# EAGLE board working (EAGLE 9.5.2)
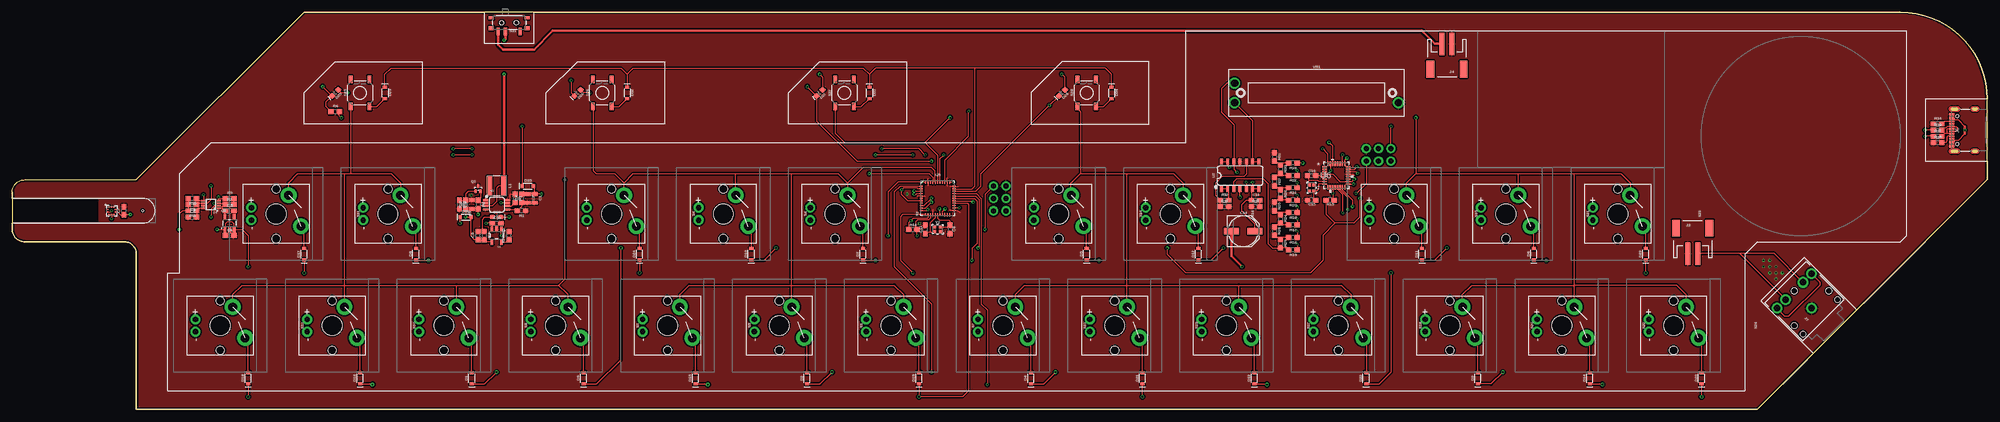
[diagram p0: board, top side]
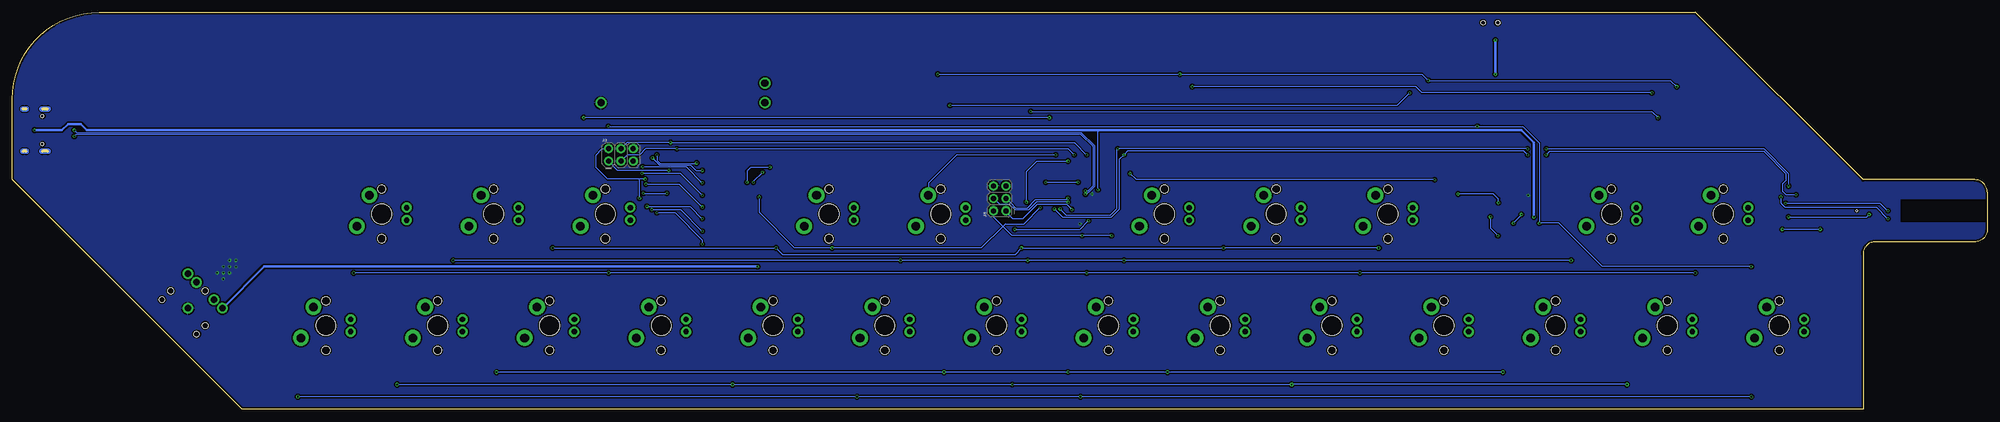
[diagram p1: board, bottom side, seen from below]

Size 403.86 x 81.28 mm. Coordinates in mm from the lower left corner, seen from the top.
Outline: 25.4,0 356.87,0 403.86,46.99 403.86,63.5 arc90 386.08,81.28 59.69,81.28 25.4,46.99 2.54,46.99 arc90 0,44.45 0,36.83 arc90 2.54,34.29 22.86,34.29 arc-90 25.4,31.75 25.4,0
Copper layers (1*16): Top 0.035mm / dielectric 1.5mm / Bottom 0.035mm
Design rules "SparkFun-2-Layer-Minimum-JLCPCB": minimum track width 5mil, minimum drill 0.3mm, track to track 5mil, track to pad 5mil, pad to pad 5mil, via to via 5mil, smd to smd 5mil, copper to edge 7mil, drill to drill 7mil, minimum pad ring 5mil, minimum via ring 5mil, stop-mask expansion 4mil, vias tented up to drill 25mil, thermal gap 10mil
Holes 0.38 mm at 26.67,40.64

## Footprints (pad centres in the part's own frame; a part is rotated, then mirrored left to right if it is on the bottom)
0805 = smd 0.8 x 1.2: 1 -0.9,0; 2 0.9,0
0603 = smd 1.1 x 1: 1 -0.85,0; 2 0.85,0
PANASONIC_D = smd 3 x 1.4: + 2.4,0; - -2.4,0
SOD-323@1 = smd 0.63 x 0.83: A 1.15,0; C -1.15,0
LED-0603@1 = smd 1 x 1: A -0.877,0; C 0.877,0
SOD-323 = smd 0.63 x 0.83: A 1.15,0; C -1.15,0
JST-2-SMD = smd 1 x 4.6: 1 -1,-3.7; 2 1,-3.7 | smd 1.6 x 3.4: NC1 -3.4,1.5; NC2 3.4,1.5
2X3-NS = drill 1.016 pad 1.88: 1 -2.54,-1.27; 2 -2.54,1.27; 3 0,-1.27; 4 0,1.27; 5 2.54,-1.27; 6 2.54,1.27
USB-C-16P-2LAYER-PADS = smd 0.3 x 1: A5 -1.25,-0.34; A6 -0.25,-0.34; A7 0.25,-0.34; A8 1.25,-0.34; B5 1.75,-0.34; B6 0.75,-0.34; B7 -0.75,-0.34; B8 -1.75,-0.34 | smd 0.6 x 1: GND -3.225,-0.34; GND2 3.225,-0.34; VBUS1 -2.45,-0.34; VBUS2 2.45,-0.34 | drill 0.4 pad 0.6 long: SHLD1 -4.318,-0.915; SHLD2 4.318,-0.915; SHLD3 -4.318,-5.095; SHLD4 4.318,-5.095 | hole 0.65: -2.89,-1.445; 2.89,-1.445
AUDIO-JACK = drill 1.3 pad 2.184: RING 5,5; RSH 5,2.5; SLEEVE 0,0; TIP 5,-5; TSH 5,-2.5 | hole 1.2: 0,5; -2.5,5; -2.5,-5; 0,-5; 5,0
INDUCTOR_4X4MM = smd 4.089 x 1.143: P$1 0,1.473; P$2 0,-1.473
SOT-416FL = smd 0.46 x 0.65: 1 -0.5,-1.1; 2 0.5,-1.1; 3 0,0.05
CHERRY-MX-LED-1U = drill 1.092 pad 2.032: A 8.255,4.445; K 10.795,4.445 | drill 1.753 pad 3.226: S1 5.715,12.065; S2 12.065,14.605 | hole 4.089: 9.525,9.525 | hole 1.707: 4.445,9.525; 14.605,9.525
TACTILE_SWITCH_SMD_5.2MM = smd 1.524 x 0.762: 1 -2.794,1.905; 2 2.794,1.905; 3 -2.794,-1.905; 4 2.794,-1.905
SWITCH_SPST_SMD_A = smd 0.7 x 1.5: 1 -2.25,-1.75; 2 -0.75,-1.75; 3 2.25,-1.75 | smd 1 x 0.6: GND1 -3.65,1; GND3 3.65,1 | smd 1 x 0.8: GND2 -3.65,-1.1; GND4 3.65,-1.1 | hole 0.9: -1.5,0; 1.5,0
SOT23-5 = smd 0.55 x 1.2: 1 -0.95,-1.3; 2 0,-1.3; 3 0.95,-1.3; 4 0.95,1.3; 5 -0.95,1.3
MSOP8 = smd 0.4 x 1.1: 1 -0.975,-2.25; 2 -0.325,-2.25; 3 0.325,-2.25; 4 0.975,-2.25; 5 0.975,2.25; 6 0.325,2.25; 7 -0.325,2.25; 8 -0.975,2.25
VSSOP_8PIN = smd 0.8 x 0.3: P1 -1.55,0.75; P2 -1.55,0.25; P3 -1.55,-0.25; P4 -1.55,-0.75; P5 1.55,-0.75; P6 1.55,-0.25; P7 1.55,0.25; P8 1.55,0.75
QFN-44-NOPAD_1:1-LESS_PASTE = smd 0.8 x 0.3: 1 -3.337,2.458; 2 -3.337,1.958; 3 -3.337,1.479; 4 -3.337,0.979; 5 -3.337,0.5; 6 -3.337,0; 7 -3.337,-0.5; 8 -3.337,-0.979; 9 -3.337,-1.479; 10 -3.337,-1.958; 11 -3.337,-2.458; 23 3.337,-2.458; 24 3.337,-1.958; 25 3.337,-1.479; 26 3.337,-0.979; 27 3.337,-0.5; 28 3.337,0; 29 3.337,0.5; 30 3.337,0.979; 31 3.337,1.479; 32 3.337,1.958; 33 3.337,2.458 | smd 0.3 x 0.8: 12 -2.458,-3.337; 13 -1.958,-3.337; 14 -1.479,-3.337; 15 -0.979,-3.337; 16 -0.5,-3.337; 17 0,-3.337; 18 0.5,-3.337; 19 0.979,-3.337; 20 1.479,-3.337; 21 1.958,-3.337; 22 2.458,-3.337; 34 2.458,3.337; 35 1.958,3.337; 36 1.479,3.337; 37 0.979,3.337; 38 0.5,3.337; 39 0,3.337; 40 -0.5,3.337; 41 -0.979,3.337; 42 -1.479,3.337; 43 -1.958,3.337; 44 -2.458,3.337
32M1-A_ATM = smd 0.914 x 0.254: 1 -2.4,1.75; 2 -2.4,1.25; 3 -2.4,0.75; 4 -2.4,0.25; 5 -2.4,-0.25; 6 -2.4,-0.75; 7 -2.4,-1.25; 8 -2.4,-1.75; 17 2.4,-1.75; 18 2.4,-1.25; 19 2.4,-0.75; 20 2.4,-0.25; 21 2.4,0.25; 22 2.4,0.75; 23 2.4,1.25; 24 2.4,1.75 | smd 0.254 x 0.914: 9 -1.75,-2.4; 10 -1.25,-2.4; 11 -0.75,-2.4; 12 -0.25,-2.4; 13 0.25,-2.4; 14 0.75,-2.4; 15 1.25,-2.4; 16 1.75,-2.4; 25 1.75,2.4; 26 1.25,2.4; 27 0.75,2.4; 28 0.25,2.4; 29 -0.25,2.4; 30 -0.75,2.4; 31 -1.25,2.4; 32 -1.75,2.4
SO14 = smd 0.6 x 1.2: 1 -3.175,-2.8; 2 -1.905,-2.8; 3 -0.635,-2.8; 4 0.635,-2.8; 5 1.905,-2.8; 6 3.175,-2.8; 7 4.445,-2.8; 8 4.445,2.8; 9 3.175,2.8; 10 1.905,2.8; 11 0.635,2.8; 12 -0.635,2.8; 13 -1.905,2.8; 14 -3.175,2.8
ICP-10101 = smd 0.35 x 0.28: 1 -0.85,0.25; 2 -0.85,-0.25; 6 0.85,-0.25; 7 0.85,0.25 | smd 0.28 x 0.35: 3 -0.5,-0.85; 4 0,-0.85; 5 0.5,-0.85; 8 0.5,0.85; 9 0,0.85; 10 -0.5,0.85
SLIDER-SMALL = drill 1.5: BOTTOM 16.75,-2; TOP -16.75,-2; WIPER -16.75,2
CRYSTAL-SMD-2.0X1.6MM = smd 0.75 x 0.7: 1 -0.675,-0.5; 2 0.675,-0.5; 3 0.675,0.5; 4 -0.675,0.5

## Placement (x,y rotation side)
C1  22uF  [0805]  106.81,43.18 270 top
C2  22uF  [0805]  105.41,43.18 270 top
C3  22uF  [0805]  93.98,41.91 90 top
C4  1.0uF  [0603]  44.45,35.56 0 top
C5  1.0uF  [0603]  44.45,40.64 0 top
C6  100pF  [0603]  36.83,39.37 0 top
C7  0.1uF  [0603]  22.86,40.64 90 top
C8  22pF  [0603]  191.77,36.83 270 top
C9  4.7uF  [0603]  95.25,35.56 90 top
C10  4.7uF  [0603]  99.06,38.1 0 top
C11  22pF  [0603]  186.69,36.83 90 top
C12  10nF  [0603]  247.9,41.53 0 top
C13  0.1uF  [0603]  254.25,42.8 0 top
C14  100uF  [PANASONIC_D]  251.71,36.45 0 top
C15  22pF  [0603]  265.68,42.8 180 top
C16  22pF  [0603]  265.68,47.88 0 top
D1  250mA/100V  [SOD-323@1]  93.98,6.35 90 top
D2  250mA/100V  [SOD-323@1]  162.56,6.35 90 top
D3  250mA/100V  [SOD-323@1]  299.72,6.35 90 top
D4  250mA/100V  [SOD-323@1]  208.28,6.35 90 top
D5  250mA/100V  [SOD-323@1]  219.71,31.75 90 top
D6  250mA/100V  [SOD-323@1]  311.15,31.75 90 top
D7  250mA/100V  [SOD-323@1]  173.99,31.75 90 top
D8  250mA/100V  [SOD-323@1]  82.55,31.75 90 top
D9  250mA/100V  [SOD-323@1]  116.84,6.35 90 top
D10  250mA/100V  [SOD-323@1]  151.13,31.75 90 top
D11  250mA/100V  [SOD-323@1]  288.29,31.75 90 top
D12  250mA/100V  [SOD-323@1]  242.57,31.75 90 top
D13  250mA/100V  [SOD-323@1]  254,6.35 90 top
D14  250mA/100V  [SOD-323@1]  322.58,6.35 90 top
D15  250mA/100V  [SOD-323@1]  139.7,6.35 90 top
D16  250mA/100V  [SOD-323@1]  71.12,6.35 90 top
D17  250mA/100V  [SOD-323@1]  59.69,31.75 90 top
D18  250mA/100V  [SOD-323@1]  48.26,6.35 90 top
D19  250mA/100V  [SOD-323@1]  185.42,6.35 90 top
D20  250mA/100V  [SOD-323@1]  345.44,6.35 90 top
D21  250mA/100V  [SOD-323@1]  231.14,6.35 90 top
D22  250mA/100V  [SOD-323@1]  276.86,6.35 90 top
D23  250mA/100V  [SOD-323@1]  334.01,31.75 90 top
D24  250mA/100V  [SOD-323@1]  128.27,31.75 90 top
D25  RED  [LED-0603@1]  66.04,64.77 225 top
D26  RED  [LED-0603@1]  115.57,64.77 225 top
D27  RED  [LED-0603@1]  165.1,64.77 225 top
D28  RED  [LED-0603@1]  214.63,64.77 225 top
D29  250mA/100V  [SOD-323@1]  76.2,64.77 270 top
D30  BLUE  [LED-0603@1]  99.06,39.37 0 top
D31  3A/10V/280mV  [SOD-323]  92.71,39.37 0 top
D32  250mA/100V  [SOD-323@1]  125.73,64.77 270 top
D33  250mA/100V  [SOD-323@1]  175.26,64.77 270 top
D34  250mA/100V  [SOD-323@1]  224.79,64.77 270 top
D35  3A/10V/280mV  [SOD-323]  105.41,45.72 0 top
FRAME1  FRAME-LEDGER  [CREATIVE_COMMONS]  177.8,-21.59 0 top  (outside the outline)
J2  JST  [JST-2-SMD]  343.64,35.56 0 top
J3  AVR_SPI_PROG_3X2NS  [2X3-NS]  279.4,52.07 0 bottom
J4  JST  [JST-2-SMD]  293.37,71.12 180 top
J5  AVR_SPI_PROG_3X2NS  [2X3-NS]  201.93,43.18 90 bottom
J6  [USB-C-16P-2LAYER-PADS]  396.24,57.15 90 top
J7  AUDIO_JACK_3.5MM_PTH  [AUDIO-JACK]  367.93,20.69 135 top
L1  2.2UH3A  [INDUCTOR_4X4MM]  99.06,45.72 270 top
Q1  100mA/20V/3.8Ω  [SOT-416FL]  95.25,45.72 0 top
R1  100k  [0603]  104.14,40.64 180 top
R2  750K  [0603]  95.25,41.91 270 top
R3  100k  [0603]  102.87,43.18 270 top
R4  750K  [0603]  104.14,43.18 90 top
R5  2.2k  [0603]  44.45,43.18 0 top
R6  330  [0603]  66.04,60.96 0 top
R7  2.2k  [0603]  44.45,41.91 0 top
R8  2.2k  [0603]  36.83,41.91 180 top
R9  1k  [0603]  96.52,35.56 270 top
R10  2.2k  [0603]  36.83,43.18 180 top
R11  200k  [0603]  36.83,40.64 180 top
R12  1k  [0603]  92.71,41.91 90 top
R13  100k  [0603]  91.44,41.91 270 top
R14  10k  [0603]  184.15,36.83 0 top
R15  10k  [0603]  269.49,42.8 180 top
R16  20k  [0603]  261.87,35.18 180 top
R17  20k  [0603]  261.87,37.72 180 top
R18  20k  [0603]  261.87,40.26 180 top
R19  20k  [0603]  261.87,32.64 180 top
R20  20k  [0603]  261.87,42.8 180 top
R21  20k  [0603]  261.87,45.34 180 top
R22  20k  [0603]  261.87,47.88 180 top
R23  20k  [0603]  261.87,50.42 180 top
R24  10k  [0603]  259.33,38.99 270 top
R25  10k  [0603]  258.06,41.53 270 top
R26  10k  [0603]  259.33,44.07 270 top
R27  10k  [0603]  258.06,46.61 270 top
R28  10k  [0603]  258.06,36.45 270 top
R29  10k  [0603]  259.33,33.91 270 top
R30  10k  [0603]  259.33,49.15 270 top
R31  10k  [0603]  258.06,51.69 270 top
R32  1k  [0603]  247.9,42.8 0 top
R33  10  [0603]  254.25,41.53 0 top
R34  5.1k  [0603]  393.7,58.42 0 top
R35  5.1k  [0603]  393.7,54.61 0 top
R36  5.1k  [0603]  393.7,57.15 0 top
R37  5.1k  [0603]  393.7,55.88 0 top
RPROG  2.0k  [0603]  101.6,35.56 90 top
S1  MECHANICAL-KEYBOARD1U  [CHERRY-MX-LED-1U]  147.32,26.67 270 top
S2  MECHANICAL-KEYBOARD1U  [CHERRY-MX-LED-1U]  158.75,49.53 270 top
S3  MECHANICAL-KEYBOARD1U  [CHERRY-MX-LED-1U]  101.6,26.67 270 top
S4  MECHANICAL-KEYBOARD1U  [CHERRY-MX-LED-1U]  135.89,49.53 270 top
S5  MECHANICAL-KEYBOARD1U  [CHERRY-MX-LED-1U]  124.46,26.67 270 top
S6  MECHANICAL-KEYBOARD1U  [CHERRY-MX-LED-1U]  113.03,49.53 270 top
S7  MECHANICAL-KEYBOARD1U  [CHERRY-MX-LED-1U]  170.18,26.67 270 top
S8  MECHANICAL-KEYBOARD1U  [CHERRY-MX-LED-1U]  78.74,26.67 270 top
S9  MECHANICAL-KEYBOARD1U  [CHERRY-MX-LED-1U]  67.31,49.53 270 top
S10  MECHANICAL-KEYBOARD1U  [CHERRY-MX-LED-1U]  55.88,26.67 270 top
S11  MECHANICAL-KEYBOARD1U  [CHERRY-MX-LED-1U]  44.45,49.53 270 top
S12  MECHANICAL-KEYBOARD1U  [CHERRY-MX-LED-1U]  33.02,26.67 270 top
S13  MECHANICAL-KEYBOARD1U  [CHERRY-MX-LED-1U]  193.04,26.67 270 top
S14  MECHANICAL-KEYBOARD1U  [CHERRY-MX-LED-1U]  204.47,49.53 270 top
S15  MECHANICAL-KEYBOARD1U  [CHERRY-MX-LED-1U]  273.05,49.53 270 top
S16  MECHANICAL-KEYBOARD1U  [CHERRY-MX-LED-1U]  227.33,49.53 270 top
S17  MECHANICAL-KEYBOARD1U  [CHERRY-MX-LED-1U]  238.76,26.67 270 top
S18  MECHANICAL-KEYBOARD1U  [CHERRY-MX-LED-1U]  261.62,26.67 270 top
S19  MECHANICAL-KEYBOARD1U  [CHERRY-MX-LED-1U]  215.9,26.67 270 top
S20  MECHANICAL-KEYBOARD1U  [CHERRY-MX-LED-1U]  284.48,26.67 270 top
S21  MECHANICAL-KEYBOARD1U  [CHERRY-MX-LED-1U]  295.91,49.53 270 top
S22  MECHANICAL-KEYBOARD1U  [CHERRY-MX-LED-1U]  307.34,26.67 270 top
S23  MECHANICAL-KEYBOARD1U  [CHERRY-MX-LED-1U]  318.77,49.53 270 top
S24  MECHANICAL-KEYBOARD1U  [CHERRY-MX-LED-1U]  330.2,26.67 270 top
S25  MOMENTARY-SWITCH-SPST-SMD-5.2MM-TALL  [TACTILE_SWITCH_SMD_5.2MM]  71.12,64.77 90 top
S26  MOMENTARY-SWITCH-SPST-SMD-5.2MM-TALL  [TACTILE_SWITCH_SMD_5.2MM]  120.65,64.77 90 top
S27  MOMENTARY-SWITCH-SPST-SMD-5.2MM-TALL  [TACTILE_SWITCH_SMD_5.2MM]  170.18,64.77 90 top
S28  MOMENTARY-SWITCH-SPST-SMD-5.2MM-TALL  [TACTILE_SWITCH_SMD_5.2MM]  219.71,64.77 90 top
S31  [SWITCH_SPST_SMD_A]  101.6,79.12 0 top
U1  MCP73831  [SOT23-5]  99.06,35.56 180 top
U2  PAM2401  [MSOP8]  99.06,41.91 270 top
U3  AP2127K-1.8V  [SOT23-5]  44.45,38.1 0 top
U4  [VSSOP_8PIN]  40.64,41.91 180 top
U5  32U4  [QFN-44-NOPAD_1:1-LESS_PASTE]  189.23,43.18 0 top
U6  ATTINY861V-10MU  [32M1-A_ATM]  270.76,47.88 0 top
U7  LMV324  [SO14]  250.44,47.88 0 top
U$1  ICP-10101  [ICP-10101]  20.32,40.64 0 top
VR1  10k  [SLIDER-SMALL]  266.7,64.77 0 top
Y1  16MHz  [CRYSTAL-SMD-2.0X1.6MM]  265.68,45.34 270 top
Y2  16MHz  [CRYSTAL-SMD-2.0X1.6MM]  189.23,36.83 0 top

## Library data of the parts
C1-C3 = SparkFun-Capacitors; PROD_ID: CAP-08402
C4 C5 = SparkFun-Capacitors; PROD_ID: CAP-00868
C6 = SparkFun-Capacitors; PROD_ID: CAP-07883
C7 C13 = SparkFun-Capacitors; PROD_ID: CAP-00810
C8 C11 C15 C16 = SparkFun-Capacitors; PROD_ID: CAP-07876
C9 C10 = SparkFun-Capacitors; PROD_ID: CAP-14106
C12 = SparkFun-Capacitors; PROD_ID: CAP-00867
C14 = SparkFun-Capacitors; PROD_ID: CAP-12547
D1-D24 D29 D32-D34 = SparkFun-DiscreteSemi; PROD_ID: DIO-09646
D25-D28 = SparkFun-LED; PROD_ID: DIO-00819
D30 = SparkFun-LED; PROD_ID: DIO-08575
D31 D35 = SparkFun-DiscreteSemi; PROD_ID: DIO-14072
FRAME1 = SparkFun-Aesthetics
J2 J4 = SparkFun-Connectors; PROD_ID: CONN-11443
J3 J5 = SparkFun-Connectors
J6 = SparkFun-Connectors; PROD_ID: CONN-14122
J7 = SparkFun-Connectors; PROD_ID: CONN-08774; SF_ID: PRT-08032
L1 = SparkFun-Coils; PROD_ID: NDUC-13770
Q1 = SparkFun-DiscreteSemi; PROD_ID: TRANS-15421
R1 R3 R13 = SparkFun-Resistors; PROD_ID: RES-07828
R2 R4 = SparkFun-Resistors; PROD_ID: RES-13768
R5 R7 R8 R10 = SparkFun-Resistors; PROD_ID: RES-08272
R6 = SparkFun-Resistors; PROD_ID: RES-00818
R9 R12 R32 = SparkFun-Resistors; PROD_ID: RES-07856
R11 = SparkFun-Resistors; PROD_ID: RES-09385
R14 R15 R24-R31 = SparkFun-Resistors; PROD_ID: RES-00824
R16-R23 = SparkFun-Resistors; PROD_ID: RES-09383
R33 = SparkFun-Resistors; PROD_ID: RES-12581
R34-R37 = SparkFun-Resistors; PROD_ID: RES-12083
RPROG = SparkFun-Resistors; PROD_ID: RES-08296
S1-S24 = SparkFun-Switches
S25-S28 = SparkFun-Switches; PROD_ID: SWCH-14139
S31 = SparkFun-Switches; PROD_ID: SWCH-10651; SF_SKU: COM-10860
U1 = SparkFun-IC-Power; PROD_ID: IC-09995
U2 = SparkFun-IC-Power; PROD_ID: IC-13769
U3 = SparkFun-IC-Power; PROD_ID: VREG-14239
U4 = SparkFun-IC-Comms; PROD_ID: IC-14450
U5 = SparkFun-IC-Microcontroller; PROD_ID: IC-10828
U6 = Melodica; COPYRIGHT: Copyright (C) 2021 Ultra Librarian. All rights reserved.; DIGI-KEY_PART_NUMBER_1: ATTINY861V-10MU-ND; DIGI-KEY_PART_NUMBER_2: 2156-ATTINY861V-10MU-ND; MANUFACTURER_PART_NUMBER: ATTINY861V-10MU; MFR_NAME: Microchip
U7 = SparkFun-IC-Amplifiers; PROD_ID: IC-08227
U$1 = Melodica
VR1 = SparkFun-Resistors; PROD_ID: RES-11924; SF_SKU: COM-11620
Y1 Y2 = SparkFun-Clocks; PROD_ID: XTAL-14681

## Nets
1.8V: C5.1 C7.1 R5.2 R7.2 U3.5 U4.P2 U$1.5 U$1.6 U$1.10
5V: C4.1 D31.C D35.C J3.2 J5.2 R8.2 R10.2 R11.2 R14.2 R15.2 U3.1 U3.3 U5.14 U5.24 U5.34 U5.44 U6.4 U6.18 U7.4
32U4_CIPO: J5.1 U5.11
32U4_COPI: J5.4 U5.10
32U4_SCK: J5.3 U5.9
861CIPO: J3.1 U6.31
!32U4_RESET: J5.5 R14.1 U5.13
!861RESET: J3.5 R15.1 U6.11
AREF: U5.42
AUDIO_OUT: C14.- J7.RING J7.TIP
COL1: D1.C D2.C D3.C D4.C U5.1
COL2: D5.C D6.C D7.C D8.C U5.28
COL3: D9.C D10.C D11.C D12.C U5.29
COL4: D13.C D14.C D15.C D16.C U5.30
COL5: D17.C D22.C D23.C D24.C U5.12
COL6: D18.C D19.C D20.C D21.C U5.26
COL7: D29.C D32.C D33.C D34.C U5.32
DAC_0: R23.1 U6.26
DAC_1: R22.1 U6.25
DAC_2: R21.1 U6.23
DAC_3: R20.1 U6.22
DAC_4: R18.1 U6.17
DAC_5: R17.1 U6.15
DAC_6: R16.1 U6.14
DAC_7: R19.1 U6.13
DAC_OUT: R19.2 R29.2 U7.3
EN: Q1.2 R2.1 U2.2
GND: C1.2 C2.2 C3.2 C4.2 C5.2 C6.1 C7.2 C8.2 C9.2 C10.2 C11.2 C12.2 C15.2 C16.2 J2.1 J3.6 J4.1 J5.6 J6.GND J6.GND2 J7.SLEEVE Q1.3 R1.1 R3.1 R13.2 R31.1 R33.1 R34.1 R35.1 RPROG.2 U1.2 U2.4 U2.8 U3.2 U4.P1 U5.5 U5.15 U5.23 U5.33 U5.35 U5.43 U6.5 U6.21 U7.11 U$1.3 U$1.8 U$1.9 VR1.BOTTOM
LED0: R6.2 U5.36
LED1: D26.A D28.C U5.31
LED2: D25.A D27.C U5.27
N$1: RPROG.1 U1.5
N$2: D30.C U1.1
N$3: J4.2 S31.1
N$4: D30.A R9.1
N$5: D1.A S8.S2
N$6: D2.A S1.S2
N$7: D3.A S20.S2
N$8: D4.A S13.S2
N$9: D5.A S14.S2
N$10: D6.A S21.S2
N$11: D7.A S2.S2
N$12: D8.A S9.S2
N$13: D9.A S3.S2
N$14: D10.A S4.S2
N$15: D11.A S15.S2
N$16: D12.A S16.S2
N$17: D13.A S17.S2
N$18: D14.A S22.S2
N$19: D15.A S5.S2
N$20: D16.A S10.S2
N$21: D17.A S11.S2
N$22: D24.A S6.S2
N$23: D23.A S23.S2
N$24: D22.A S18.S2
N$25: D21.A S19.S2
N$26: D20.A S24.S2
N$27: D19.A S7.S2
N$28: D18.A S12.S2
N$29: R1.2 R4.1 U2.5
N$30: L1.P$2 U2.1
N$31: R3.2 U2.6
N$32: D29.A S25.3
N$33: D32.A S26.3
N$34: Q1.1 R12.2 R13.1
N$35: D33.A S27.3
N$36: D34.A S28.3
N$37: D25.C D26.C D27.A D28.A R6.1
N$38: U5.8
N$40: C6.2 R11.1 U4.P7 U4.P8
N$42: C1.1 C2.1 D35.A R4.2 U2.7
N$43: C11.1 U5.16 Y2.1
N$44: C8.1 U5.17 Y2.3
N$45: U7.8 U7.9 VR1.TOP
N$46: R16.2 R28.2 R29.1
N$47: R17.2 R24.2 R28.1
N$48: R18.2 R24.1 R25.2
N$49: R20.2 R25.1 R26.2
N$50: R21.2 R26.1 R27.2
N$51: R22.2 R27.1 R30.2
N$52: R23.2 R30.1 R31.2
N$53: R32.2 U7.1 U7.2
N$54: C12.1 R32.1 U7.10
N$55: U7.5 U7.12 VR1.WIPER
N$56: C13.1 C14.+ U7.6 U7.7 U7.13 U7.14
N$57: C13.2 R33.2
N$58: J6.A5 R35.2
N$59: J6.B5 R34.2
N$60: J6.A6 J6.B6 R36.2
N$61: J6.A7 J6.B7 R37.2
N$62: C16.1 U6.7 Y1.1
N$63: C15.1 U6.8 Y1.3
N$76: J2.2 J7.RSH J7.TSH
N$77: U5.37
N$79: U5.20
N$80: U5.21
ROW1: S3.S1 S8.S1 S9.S1 S10.S1 S11.S1 S12.S1 S25.1 U5.41
ROW2: S1.S1 S2.S1 S4.S1 S5.S1 S6.S1 S7.S1 S26.1 U5.40
ROW3: S15.S1 S20.S1 S21.S1 S22.S1 S23.S1 S24.S1 S27.1 U5.39
ROW4: S13.S1 S14.S1 S16.S1 S17.S1 S18.S1 S19.S1 S28.1 U5.38
SCL1_8: R7.1 U4.P3 U$1.2
SCL5: J3.3 R8.1 U4.P6 U5.18 U6.32
SDA1_8: R5.1 U4.P4 U$1.4
SDA5: J3.4 R10.1 U4.P5 U5.19 U6.30
TXLED: U5.22
UCAP: U5.6
USB_N: R37.1 U5.3
USB_P: R36.1 U5.4
VBATT: C3.1 C10.1 L1.P$1 R2.2 S31.2 U1.3 U2.3
VUSB: C9.1 D31.A J6.VBUS1 J6.VBUS2 R9.2 R12.1 U1.4 U5.2 U5.7

## Tracks (layer width: path | path; a pad name or v marks a point on that pad's centre or on a via)
1.8V  (via drill 0.3)
  Top 0.152: U$1.6 21.59,40.39 22.22,39.75 22.82,39.75 C7.1 24.04,39.79 v24.13,39.88 | v40.64,39.37 40.64,41.02 41.28,41.66 U4.P2 42.67,41.66 42.8,41.53 42.8,41.15 42.93,41.02 43.26,41.02 43.6,40.68 | U3.5 43.5,40.54 C5.1 43.6,40.68 | R5.2 R7.2 44.92,41.53 44.58,41.53 44.45,41.4 44.45,41.15 44.32,41.02 43.94,41.02 43.6,40.68
  Bottom 0.152: v40.64,39.37 24.64,39.37 v24.13,39.88
5V  (via drill 0.3)
  Top 0.152: R10.2 R8.2 R11.2 34.8,40.64 34.16,40.01 v34.16,36.83 | U5.14 187.75,39.16 187.33,38.73 185.17,38.73 184.75,38.31 184.75,37.08 R14.2 185,35.6 v185.04,35.56 | U6.4 270.01,48.13 271.51,46.63 U6.18 273.96,46.63 v274.45,47.12 | R15.2 268.64,39.97 270.51,38.1 | 270.51,38.1 274.32,38.1 275.59,39.37 v275.59,43.18 | J3.2 v281.94,57.91 | v104.27,57.91 D35.C | v91.57,38.1 v91.56,38.11 D31.C | U5.24 192.62,41.27 v193.68,41.27 | U3.1 43.5,37.91 43.94,38.35 44.96,38.35 45.4,37.91 U3.3 47.02,36.8 48.26,35.56 v48.26,29.21 | v41.91,36.83 43.47,36.83 U3.1 | U3.1 43.6,36.7 C4.1 | U5.34 192.5,46.52 v192.53,46.48 | U5.44 185.96,46.52 v185.93,46.48 181.1,46.48 179.07,44.45 v179.07,35.56 | v251.08,43.43 U7.4 | 270.51,38.1 267.97,35.56 267.97,30.48 265.43,27.94 240.03,27.94 236.22,31.75 v236.22,33.02
  Bottom 0.152: v274.45,47.12 275.59,47.12 | 275.59,47.12 282.07,47.12 284.48,49.53 284.48,52.07 283.21,53.34 J3.2 | v275.59,43.18 275.59,47.12 | v281.94,57.91 v104.27,57.91 95,57.91 91.57,54.48 v91.57,38.1 87.63,38.1 78.74,29.21 v48.26,29.21 | J5.2 203.2,39.37 201.3,37.47 | v34.16,36.83 v41.91,36.83 | v192.53,46.48 v185.93,46.48 | v179.07,35.56 v185.04,35.56 199.39,35.56 201.3,37.47 | v193.68,41.27 196.98,37.97 200.79,37.97 201.3,37.47 | 201.3,37.47 205.74,33.02 v236.22,33.02 243.84,33.02 251.08,40.26 v251.08,43.43
32U4_CIPO  (via drill 0.3)
  Top 0.152: U5.11 187.03,40.72 v187.2,40.89
  Bottom 0.152: v187.2,40.89 188.21,41.91 194.31,41.91 197.23,38.99 199.26,38.99 200.66,40.39 J5.1
32U4_COPI  (via drill 0.3)
  Top 0.152: U5.10 186.76,41.22 v187.96,42.42
  Bottom 0.152: v187.96,42.42 194.44,42.42 196.09,40.77 198.75,40.77 199.9,41.91 201.93,41.91 J5.4
32U4_SCK  (via drill 0.3)
  Top 0.152: U5.9 186.48,41.7 v187.96,43.18
  Bottom 0.152: J5.3 199.67,42.19 199.66,42.19 198.61,41.15 196.34,41.15 194.69,42.8 188.34,42.8 v187.96,43.18
861CIPO  (via drill 0.3)
  Top 0.152: 269.51,50.49 U6.31 269.51,49 v269.62,48.9
  Bottom 0.152: v269.62,48.9 280.03,48.9 J3.1
!32U4_RESET  (via drill 0.3)
  Top 0.152: U5.13 187.27,39.22 187.07,39.01 184.18,39.01 v183.77,38.61 183.3,38.14 R14.1 | J5.5 198.88,43.94 v198.88,36.83
  Bottom 0.152: v198.88,36.83 185.55,36.83 v183.77,38.61
!861RESET  (via drill 0.3)
  Top 0.152: U6.11 v270.01,44.2 270.01,43.13 R15.1 | J3.5 276.86,46.23 v274.83,44.2
  Bottom 0.152: v274.83,44.2 v270.01,44.2
AUDIO_OUT  (via drill 0.3)
  Top 0.254: J7.TIP 369.57,26.12 369.57,25.4 363.22,19.05 362.5,19.05 J7.RING
  Top 0.508: C14.- 249.31,31.36 v251.46,29.21
  Bottom 0.508: v251.46,29.21 352.34,29.21 J7.RING
COL1  (via drill 0.3, 0.38)
  Top 0.152: U5.1 181.53,45.64 180.34,44.45 180.34,29.21 187.96,21.59 v187.96,7.62
  Top 0.254: D1.C 96.64,5.2 v99.06,7.62 | v304.8,7.62 302.38,5.2 D3.C | D4.C 210.94,5.2 v213.36,7.62 | D2.C 165.22,5.2 v167.64,7.62
  Bottom 0.254: v99.06,7.62 v167.64,7.62 v187.96,7.62 v213.36,7.62 v304.8,7.62
COL2  (via drill 0.3, 0.38)
  Top 0.152: U5.28 196.72,43.18 197.23,42.67 197.23,33.91 196.22,32.89 v196.22,30.48
  Top 0.254: D8.C 82.67,30.48 v85.09,30.48 | v313.69,30.48 311.27,30.48 D6.C | D5.C 222.13,30.6 v222.25,30.48 | D7.C 174.11,30.48 v176.53,30.48
  Bottom 0.254: v85.09,30.48 v176.53,30.48 v196.22,30.48 v222.25,30.48 v313.69,30.48
COL3  (via drill 0.3, 0.38)
  Top 0.152: U5.29 196.99,43.68 197.74,42.93 197.74,33.27 v197.49,33.02
  Top 0.254: D10.C 153.79,30.6 v156.21,33.02 | D11.C 290.95,30.6 v293.37,33.02 | D12.C 245.23,30.6 v247.65,33.02 | D9.C 119.5,5.2 124.46,10.16 v124.46,33.02
  Bottom 0.254: v293.37,33.02 v247.65,33.02 246.38,31.75 198.75,31.75 v197.49,33.02 v156.21,33.02 v124.46,33.02
COL4  (via drill 0.3, 0.38)
  Top 0.152: U5.30 197.14,44.16 198.12,43.18 198.12,21.59 199.39,20.32 v199.39,5.08
  Top 0.254: D16.C 73.54,5.2 v73.66,5.08 | v142.24,5.08 139.82,5.08 D15.C | D13.C 256.42,5.2 v256.54,5.08 | D14.C 325,5.2 v325.12,5.08
  Bottom 0.254: v73.66,5.08 v142.24,5.08 v199.39,5.08 v256.54,5.08 v325.12,5.08
COL5  (via drill 0.3, 0.38)
  Top 0.152: U5.12 182.08,39.84 181.61,39.37 181.61,30.48 v184.15,27.94
  Top 0.254: D17.C v59.69,27.94 | v334.01,27.94 D23.C | D22.C 279.52,5.2 281.94,7.62 v281.94,27.94 | D24.C v128.27,27.94
  Bottom 0.254: v59.69,27.94 v128.27,27.94 v184.15,27.94 v281.94,27.94 v334.01,27.94
COL6  (via drill 0.38)
  Top 0.152: D19.C v185.42,2.54 194.31,2.54 195.58,3.81 195.58,41.91 195.29,42.2 U5.26
  Top 0.254: D18.C v48.26,2.54 | v345.44,2.54 D20.C | v231.14,2.54 D21.C
  Bottom 0.254: v48.26,2.54 v185.42,2.54 v231.14,2.54 v345.44,2.54
COL7
  Top 0.152: D29.C 76.2,68.58 77.47,69.85 124.46,69.85 125.73,68.58 | 125.73,68.58 D32.C | 125.73,68.58 127,69.85 173.99,69.85 175.26,68.58 | 175.26,68.58 D33.C | D34.C 224.79,68.58 223.52,69.85 196.85,69.85 | 196.85,69.85 176.53,69.85 175.26,68.58 | U5.32 196.27,45.14 196.85,45.72 196.85,69.85
DAC_0  (via drill 0.3)
  Top 0.152: U6.26 272.01,52.05 v272.03,52.07 | v263.91,50.42 R23.1
  Bottom 0.152: v272.03,52.07 272.03,50.95 271.4,50.32 269.24,50.32 264.01,50.32 v263.91,50.42
DAC_1  (via drill 0.3)
  Top 0.152: U6.25 272.51,51.03 v272.92,51.44 | v262.76,48.9 262.76,47.92 R22.1
  Bottom 0.152: v272.92,51.44 271.53,50.04 265.18,50.04 264.03,48.9 v262.76,48.9
DAC_2  (via drill 0.3)
  Top 0.152: U6.23 274.43,49.13 v274.96,49.66 v274.95,49.66 | v262.76,46.35 262.76,45.38 R21.1
  Bottom 0.152: v274.95,49.66 266.06,49.66 v262.76,46.35
DAC_3  (via drill 0.3)
  Top 0.152: U6.22 274.79,48.63 v275.08,48.34 | v262.76,43.81 262.76,42.84 R20.1
  Bottom 0.152: v275.08,48.34 267.28,48.34 v262.76,43.81
DAC_4  (via drill 0.3)
  Top 0.152: U6.17 274.29,46.13 v274.32,46.1 | v262.76,41.4 262.76,40.3 R18.1
  Bottom 0.152: v274.32,46.1 267.46,46.1 v262.76,41.4
DAC_5  (via drill 0.3)
  Top 0.152: U6.15 272.01,44.85 274.07,42.8 v274.07,41.53 | v262.76,38.99 262.76,37.76 R17.1
  Bottom 0.152: v274.07,41.53 265.3,41.53 v262.76,38.99
DAC_6  (via drill 0.3)
  Top 0.152: U6.14 271.56,45.44 271.56,44.91 273.05,43.42 v273.05,40.89 | v262.76,36.45 262.76,35.22 R16.1
  Bottom 0.152: v273.05,40.89 267.21,40.89 v262.76,36.45
DAC_7  (via drill 0.3)
  Top 0.152: U6.13 271.18,45.31 271.18,44.89 272.03,44.04 v272.03,40.26 | v262.76,33.78 262.76,32.68 R19.1
  Bottom 0.152: v272.03,40.26 268.35,40.26 262.76,34.67 v262.76,33.78
DAC_OUT
  Top 0.152: R19.2 260.6,33.06 R29.2 257.64,33.06 256.79,33.91 256.79,46.23 255.78,47.24 250.44,47.24 249.81,46.61 U7.3
EN
  Top 0.203: U2.2 95.78,42.23 R2.1 95.75,43.26 Q1.2
GND  (via drill 0.3)
  Top 0.152: U6.5 267.58,47.63 267.33,47.88 C16.2 | U6.21 274.07,48.13 274.32,47.88 | 193.8,40.26 193.34,40.72 U5.23 191.81,40.72 191.77,40.77 | U5.15 188.25,40.8 188.34,40.89 | 186.69,43.69 185.9,43.69 U5.5 185.16,43.68 185.04,43.56 | 187.33,47.24 187.27,47.19 U5.43 187.27,45.79 187.2,45.72 | 193.42,45.59 193.38,45.64 U5.33 191.85,45.64 191.77,45.72 | 191.14,45.72 191.19,45.77 U5.35 191.19,47.3 191.26,47.37 | U3.2 44.45,36.41 C4.2 | 101.85,44.07 102.83,44.07 R3.1
  Top 0.203: U2.8 101.35,42.93 101.85,42.93 101.85,44.07
  other vias: 185.55,37.97 358.14,30.48 359.41,30.48 358.14,29.21 359.41,29.21 360.68,29.21 360.68,27.94 359.41,27.94 361.95,27.94 360.68,26.67 183.01,44.07 93.85,43.81
  pour Top (isolate 0.305): 0,43.18 0,44.45 arc-90 2.54,46.99 25.4,46.99 59.69,81.28 386.08,81.28 arc-90 403.86,63.5 403.86,62.23 403.86,46.99 356.87,0 25.4,0 25.4,30.48 25.4,31.75 arc90 22.86,34.29 2.54,34.29 arc-90 0,36.83 0,38.1 17.78,38.1 17.78,43.18
  pour Bottom (isolate 0.305): 0,43.18 0,44.45 arc-90 2.54,46.99 25.4,46.99 59.69,81.28 386.08,81.28 arc-90 403.86,63.5 403.86,59.69 403.86,46.99 356.87,0 25.4,0 25.4,31.75 arc90 22.86,34.29 2.54,34.29 arc-90 0,36.83 0,38.1 17.78,38.1 17.78,43.18
LED0  (via drill 0.3)
  Top 0.152: U5.36 190.71,51.01 195.58,55.88 v195.58,60.96 | v67.31,59.69 66.89,60.11 R6.2
  Bottom 0.152: v195.58,60.96 68.58,60.96 v67.31,59.69
LED1  (via drill 0.3)
  Top 0.152: U5.31 197.06,44.66 198.12,45.72 198.12,48.26 v212.09,62.23 D28.C | v118.11,64.77 116.81,64.77 D26.A
  Bottom 0.152: v212.09,62.23 120.65,62.23 v118.11,64.77
LED2  (via drill 0.3)
  Top 0.152: D27.C 164.48,64.12 | v187.96,50.8 172.72,50.8 164.48,59.04 164.48,63.5 164.48,64.12 | U5.27 196.21,42.68 v196.47,42.42 | D25.A 67.28,64.77 v68.58,64.77 | v162.56,66.04 164.48,64.12
  Bottom 0.152: v196.47,42.42 196.47,48.64 194.31,50.8 v187.96,50.8 | v68.58,64.77 115.57,64.77 116.84,66.04 v162.56,66.04
N$1
  Top 0.203: U1.5 101.15,34.26 RPROG.1
N$2  (via drill 0.3)
  Top 0.152: D30.C v101.6,39.37 | v100.08,35.56 100.01,35.63 U1.1
  Bottom 0.152: v101.6,39.37 101.6,37.08 v100.08,35.56
N$3
  Top 0.508: S31.1 99.35,74.64 100.33,73.66 106.68,73.66 110.49,77.47 288.29,77.47 290.94,74.82 J4.2
N$4
  Top 0.203: R9.1 96.14,36.79 96.14,38.86 96.65,39.37 D30.A
N$5
  Top 0.254: D1.A 93.98,13.34 S8.S2
N$6
  Top 0.254: D2.A 162.56,13.34 S1.S2
N$7
  Top 0.254: D3.A 299.72,13.34 S20.S2
N$8
  Top 0.254: D4.A 208.28,13.34 S13.S2
N$9
  Top 0.254: D5.A 219.71,36.2 S14.S2
N$10
  Top 0.254: D6.A 311.15,36.2 S21.S2
N$11
  Top 0.254: D7.A 173.99,36.2 S2.S2
N$12
  Top 0.254: D8.A 82.55,36.2 S9.S2
N$13
  Top 0.254: D9.A 116.84,13.34 S3.S2
N$14
  Top 0.254: D10.A 151.13,36.2 S4.S2
N$15
  Top 0.254: D11.A 288.29,36.2 S15.S2
N$16
  Top 0.254: D12.A 242.57,36.2 S16.S2
N$17
  Top 0.254: D13.A 254,13.34 S17.S2
N$18
  Top 0.254: D14.A 322.58,13.34 S22.S2
N$19
  Top 0.254: D15.A 139.7,13.34 S5.S2
N$20
  Top 0.254: D16.A 71.12,13.34 S10.S2
N$21
  Top 0.254: D17.A 59.69,36.2 S11.S2
N$22
  Top 0.254: D24.A 128.27,36.2 S6.S2
N$23
  Top 0.254: D23.A 334.01,36.2 S23.S2
N$24
  Top 0.254: S18.S2 276.86,13.34 D22.A
N$25
  Top 0.254: D21.A 231.14,13.34 S19.S2
N$26
  Top 0.254: D20.A 345.44,13.34 S24.S2
N$27
  Top 0.254: D19.A 185.42,13.34 S7.S2
N$28
  Top 0.254: D18.A 48.26,13.34 S12.S2
N$29
  Top 0.203: U2.5 103,40.94 R1.2 104.14,41.49 R4.1
N$30
  Top 0.203: U2.1 96.81,43.47 97.59,44.25 L1.P$2
N$31
  Top 0.203: U2.6 102.12,41.59 R3.2
N$32
  Top 0.152: S25.3 74.56,61.98 D29.A
N$33
  Top 0.152: S26.3 124.09,61.98 D32.A
N$34
  Top 0.203: R13.1 R12.2 92.71,44.07 93.26,44.62 Q1.1
N$35
  Top 0.152: S27.3 173.62,61.98 D33.A
N$36
  Top 0.152: S28.3 223.15,61.98 D34.A
N$37  (via drill 0.3)
  Top 0.152: R6.1 64.13,62.02 64.13,62.87 D25.C 65.39,64.15 v63.5,66.04 | D28.A 215.25,67.96 v214.63,68.58 | v165.1,68.58 165.72,67.96 D27.A | v114.3,67.31 114.3,64.8 D26.C
  Bottom 0.152: v214.63,68.58 v165.1,68.58 115.57,68.58 v114.3,67.31 64.77,67.31 v63.5,66.04
N$40
  Top 0.152: U4.P7 U4.P8 39.08,41.15 37.97,41.15 37.68,40.85 R11.1 C6.2
N$42  (via drill 0.3)
  Top 0.203: U2.7 100,42.23 v99.95,42.29 | v108.2,44.07 v108.19,44.08 C1.1 106.68,44.08 | 106.68,44.08 C2.1 105.36,44.03 R4.2 | D35.A 106.68,45.6 106.68,44.08
  Bottom 0.203: v99.95,42.29 99.95,43.05 100.97,44.07 v108.2,44.07
N$43
  Top 0.152: U5.16 188.73,39.12 187.71,38.1 187.71,36.32 | 187.71,36.32 188.55,36.32 Y2.1 | C11.1 187.03,36.32 187.71,36.32
N$44
  Top 0.152: U5.17 189.23,39.12 189.61,38.73 191.52,38.73 191.77,38.48 C8.1 191.42,37.33 Y2.3
N$45
  Top 0.152: VR1.TOP 253.62,59.1 U7.9 U7.8
N$46
  Top 0.152: R16.2 259.75,35.18 R29.1 259.33,35.18 258.06,35.18 R28.2
N$47
  Top 0.152: R17.2 259.75,37.72 R24.2 259.33,37.72 258.06,37.72 R28.1
N$48
  Top 0.152: R18.2 259.75,40.26 R24.1 259.33,40.26 258.06,40.26 R25.2
N$49
  Top 0.152: R20.2 259.75,42.8 R26.2 259.33,42.8 258.06,42.8 R25.1
N$50
  Top 0.152: R21.2 259.75,45.34 R26.1 259.33,45.34 258.06,45.34 R27.2
N$51
  Top 0.152: R22.2 259.75,47.88 R30.2 259.33,47.88 258.06,47.88 R27.1
N$52
  Top 0.152: R23.2 259.75,50.42 R30.1 259.33,50.42 258.06,50.42 R31.2
N$53
  Top 0.152: 248.75,44.86 U7.2
  Top 0.254: R32.2 248.75,44.86 | U7.2 U7.1
N$54
  Top 0.152: U7.10 252.35,48.13 251.84,47.62 247.4,47.62 246,46.23 246,43.85 R32.1
  Top 0.254: C12.1 R32.1
N$55  (via drill 0.3)
  Top 0.152: U7.12 249.81,58.3 247.27,60.84 247.27,65.66 248.38,66.77 VR1.WIPER
  Top 0.203: U7.12 249.81,49.15 v250.44,48.51 | v252.35,46.48 U7.5
  Bottom 0.203: v250.44,48.51 252.35,46.61 v252.35,46.48
N$56  (via drill 0.3)
  Top 0.152: U7.6 253.4,44.86 | U7.14 U7.13
  Top 0.203: U7.13 248.54,49.91 v248.92,49.53 | v253.62,46.48 U7.6
  Top 0.254: 253.4,44.86 C13.1 252.35,42.8 251.46,41.91 251.46,40.64 254.11,37.99 C14.+ | U7.7 U7.6
  Bottom 0.203: v248.92,49.53 252.86,49.53 253.62,48.77 v253.62,46.48
N$57
  Top 0.254: R33.2 C13.2
N$58
  Top 0.152: J6.A5 395.75,55.9 395.6,55.75 395.6,54.86 395.35,54.61 R35.2
N$59
  Top 0.152: J6.B5 395.03,58.9 R34.2
N$60
  Top 0.152: J6.A6 397.51,56.9 397.76,57.15 397.76,57.66 397.52,57.9 J6.B6 395.72,57.9 395.35,57.53 394.93,57.53 R36.2
N$61
  Top 0.152: J6.B7 395.6,56.4 | 395.6,56.4 395.07,56.4 R37.2 | J6.A7 395.73,57.4 395.6,57.28 395.6,56.4
N$62
  Top 0.152: Y1.1 265.18,46.86 | 265.18,46.86 265.18,47.53 C16.1 | U6.7 267.19,46.63 266.95,46.86 265.18,46.86
N$63
  Top 0.152: C15.1 266.18,43.15 Y1.3 266.79,44.66 267.08,44.96 267.08,45.97 267.24,46.13 U6.8
N$76
  Top 0.254: J7.RSH 353.22,31.86 | 353.22,31.86 J2.2 | J7.TSH 360.3,31.86 353.22,31.86
ROW1  (via drill 0.3)
  Top 0.152: S25.1 69.22,48.26 | 111.76,25.4 113.03,26.67 v113.03,46.99 | v175.26,48.26 187.45,48.26 188.25,47.46 U5.41
  Top 0.254: S12.S1 45.08,23.5 46.99,25.4 67.94,25.4 | 67.94,25.4 90.81,25.4 | 90.81,25.4 S8.S1 | S11.S1 56.52,46.35 58.42,48.26 67.94,48.26 | 67.94,48.26 69.22,48.26 77.47,48.26 79.38,46.35 S9.S1 | 67.94,25.4 67.94,48.26 | S3.S1 113.66,23.5 111.76,25.4 90.81,25.4 | S10.S1 67.94,25.4
  Bottom 0.152: v113.03,46.99 173.99,46.99 v175.26,48.26
ROW2
  Top 0.152: S26.1 118.75,48.9 119.38,48.26 123.19,48.26 125.09,46.35 | U5.40 188.73,48.76 187.96,49.53 173.99,49.53 170.81,46.35
  Top 0.254: S5.S1 136.53,23.5 138.43,25.4 159.39,25.4 | 159.39,25.4 180.34,25.4 182.25,23.5 S7.S1 | S6.S1 125.09,46.35 127,48.26 147.96,48.26 | 147.96,48.26 159.39,48.26 | 159.39,48.26 168.91,48.26 170.81,46.35 S2.S1 | S4.S1 147.96,48.26 | S1.S1 159.39,25.4 | 159.39,25.4 159.39,48.26
ROW3  (via drill 0.3)
  Top 0.152: S27.1 168.28,56.52 170.18,54.61 186.69,54.61 | 186.69,54.61 189.23,52.07 U5.39 | 186.69,54.61 v191.77,59.69 | v287.02,59.69 287.02,48.26
  Top 0.254: S15.S1 285.11,46.35 287.02,48.26 307.97,48.26 | 307.97,48.26 319.4,48.26 | 319.4,48.26 328.93,48.26 330.83,46.35 S23.S1 | S21.S1 307.97,48.26 | S20.S1 296.54,23.5 298.45,25.4 319.4,25.4 | 319.4,25.4 340.36,25.4 342.26,23.5 S24.S1 | S22.S1 319.4,25.4 | 319.4,25.4 319.4,48.26
  Bottom 0.152: v191.77,59.69 v287.02,59.69
ROW4  (via drill 0.3)
  Top 0.152: S28.1 217.81,61.59 218.44,60.96 218.44,48.26 | U5.38 189.73,51.3 v190.5,52.07
  Top 0.254: S13.S1 205.11,23.5 207.01,25.4 227.97,25.4 | 227.97,25.4 250.83,25.4 | 250.83,25.4 271.78,25.4 273.69,23.5 S18.S1 | S19.S1 227.97,25.4 | S17.S1 250.83,25.4 | S14.S1 216.53,46.35 218.44,48.26 227.97,48.26 | 227.97,48.26 237.49,48.26 239.4,46.35 S16.S1 | 227.97,25.4 227.97,48.26
  Bottom 0.152: v190.5,52.07 210.82,52.07 216.53,46.35 S14.S1
SCL1_8  (via drill 0.3)
  Top 0.152: U$1.2 20.07,40.39 v20.32,40.64 | v41.27,42.16 U4.P3 43.35,42.16 R7.1
  Bottom 0.152: v20.32,40.64 21.84,42.16 v41.27,42.16
SCL5  (via drill 0.3)
  Top 0.152: R8.1 37.93,42.16 U4.P6 39.87,42.16 40.64,42.93 v40.64,45.72 | U6.32 269.01,52.3 v267.97,53.34 | U5.18 189.73,40.9 v189.61,41.02 | v93.98,53.34 v90.17,53.34 | v186.69,52.07 185.42,53.34 v177.8,53.34
  Bottom 0.152: J3.3 278.13,52.07 275.59,52.07 274.32,53.34 v267.97,53.34 187.96,53.34 v186.69,52.07 | v189.61,41.02 188.34,39.75 179.32,39.75 177.93,41.15 177.93,53.21 v177.8,53.34 v93.98,53.34 | v90.17,53.34 45.72,53.34 40.64,48.26 v40.64,45.72
SDA1_8  (via drill 0.3)
  Top 0.152: U$1.4 v20.32,38.99 | v42.16,43.43 42.16,43.18 | 42.16,43.18 42.16,42.69 U4.P4 | 42.16,43.18 R5.1
  Bottom 0.152: v20.32,38.99 22.61,41.27 41.27,41.27 42.16,42.16 v42.16,43.43
SDA5  (via drill 0.3)
  Top 0.152: R10.1 38.2,42.66 U4.P5 39.12,42.69 v39.12,43.94 | U6.30 270.01,53.84 v269.24,54.61 | U5.19 190.21,40.48 v190.75,41.02 | v93.98,52.07 v90.17,52.07 | v184.15,52.07 v176.53,52.07
  Bottom 0.152: J3.4 278.13,54.61 v269.24,54.61 186.69,54.61 v184.15,52.07 | v190.75,41.02 189.1,39.37 179.07,39.37 177.42,41.02 177.42,51.18 v176.53,52.07 175.77,52.83 94.74,52.83 v93.98,52.07 | v90.17,52.07 89.41,52.83 45.72,52.83 41.15,48.26 41.15,46.86 41.91,46.1 41.91,44.7 41.15,43.94 v39.12,43.94
USB_N  (via drill 0.3)
  Top 0.152: U5.3 185.35,44.66 185.34,44.66 184.86,44.66 184.82,44.7 v184.4,44.7
  Top 0.254: R37.1 v391.16,55.88
  Bottom 0.152: v391.16,55.88 390.66,56.38 185.42,56.38 182.88,53.84 182.88,45.72 183.9,44.7 v184.4,44.7
USB_P  (via drill 0.3)
  Top 0.152: U5.4 185.36,44.16 185.34,44.14 184.9,44.14 184.78,44.02 v184.4,44.02
  Top 0.254: R36.1 v391.16,57.15
  Bottom 0.152: v391.16,57.15 390.66,56.66 185.3,56.66 182.6,53.95 182.6,45.6 183.78,44.42 183.9,44.42 184.3,44.02 v184.4,44.02
VBATT  (via drill 0.3)
  Top 0.152: L1.P$1 99.44,45.72 99.06,45.34 99.06,42.55 98.1,41.59 U2.3
  Top 0.203: U2.3 95.78,41.59 R2.2 | R2.2 94.03,41.06 C3.1 | U1.3 98.11,38 C10.1 v96.9,38.1 | v95.25,39.88 R2.2
  Top 0.508: S31.2 100.85,75.83 v100.58,75.56 | v100.58,68.58 100.58,45.77 L1.P$1
  Bottom 0.203: v96.9,38.1 95.25,39.75 v95.25,39.88
  Bottom 0.508: v100.58,75.56 v100.58,68.58
VUSB  (via drill 0.3)
  Top 0.152: U5.2 185.24,45.14 185.07,45.31 182.21,45.31 v181.86,44.96 181.86,43.94 183.13,42.68 U5.7
  Top 0.203: U1.4 96.97,34.26 R9.2 C9.1 94.58,34.71 93.85,35.43 D31.A | D31.A | R12.1 v92.71,39.37 v92.72,39.36 D31.A
  Top 0.254: J6.VBUS2 396.96,59.6 397.26,59.31 397.89,59.31 399.29,57.91 | 399.29,56.39 397.89,54.99 397.26,54.99 396.96,54.7 J6.VBUS1
  Top 0.508: 399.29,57.91 v399.29,57.15 399.29,56.39
  Bottom 0.152: v181.86,44.96 181.86,56.9 181.61,57.15
  Bottom 0.508: v399.29,57.15 393.7,57.15 392.43,58.42 389.89,58.42 388.62,57.15 181.61,57.15 95.25,57.15 92.71,54.61 v92.71,39.37

## Text on the board
tDocu: 400mAh LiPo | NPoole